# EAGLE board Atmega32_Breakout (EAGLE 6.5.0)

Size 25.07 x 40.63 mm. Coordinates in mm from the lower left corner, seen from the top.
Outline: 0,0 25.07,0 25.07,40.63 0,40.63 0,0
Copper layers (1*16): Top 0.035mm / dielectric 1.5mm / Bottom 0.035mm
Design rules "default": minimum track width 10mil, minimum drill 24mil, track to track 8mil, track to pad 8mil, pad to pad 8mil, via to via 8mil, smd to smd 8mil, copper to edge 40mil, drill to drill 8mil, minimum pad ring 10mil, minimum via ring 8mil, stop-mask expansion 4mil, vias tented up to drill 0mil, thermal gap 10mil

## Footprints (pad centres in the part's own frame; a part is rotated, then mirrored left to right if it is on the bottom)
1X08_PIN1_NO_SILK = drill 1.016 pad 1.88 square: 1 0,0 | drill 1.016 pad 1.88: 2 2.54,0; 3 5.08,0; 4 7.62,0; 5 10.16,0; 6 12.7,0; 7 15.24,0; 8 17.78,0
TQFP32-08 = smd 1.27 x 0.559: 1 -4.293,2.8; 2 -4.293,2; 3 -4.293,1.2; 4 -4.293,0.4; 5 -4.293,-0.4; 6 -4.293,-1.2; 7 -4.293,-2; 8 -4.293,-2.8; 17 4.293,-2.8; 18 4.293,-2; 19 4.293,-1.2; 20 4.293,-0.4; 21 4.293,0.4; 22 4.293,1.2; 23 4.293,2; 24 4.293,2.8 | smd 0.559 x 1.27: 9 -2.8,-4.293; 10 -2,-4.293; 11 -1.2,-4.293; 12 -0.4,-4.293; 13 0.4,-4.293; 14 1.2,-4.293; 15 2,-4.293; 16 2.8,-4.293; 25 2.8,4.293; 26 2,4.293; 27 1.2,4.293; 28 0.4,4.293; 29 -0.4,4.293; 30 -1.2,4.293; 31 -2,4.293; 32 -2.8,4.293

## Placement (x,y rotation side)
JP1  [1X08_PIN1_NO_SILK]  1.27,19.05 270 top
JP2  [1X08_PIN1_NO_SILK]  1.27,39.37 270 top
JP3  [1X08_PIN1_NO_SILK]  24.13,1.27 90 top
JP4  [1X08_PIN1_NO_SILK]  24.13,21.59 90 top
U1  ATMEGA328P  [TQFP32-08]  12.85,19.95 315 top

## Library data of the parts
JP1-JP4 = SparkFun-Connectors
U1 = SparkFun-DigitalIC; PROD_ID: IC-09069

## Nets
ADC6: JP3.8 U1.19
ADC7: JP2.1 U1.22
AGND: JP4.1 U1.21
AREF: JP4.4 U1.20
AVCC: JP4.7 U1.18
GND: JP1.8 U1.3 U1.5
PB0: JP1.2 U1.12
PB1: JP1.3 U1.13
PB2: JP1.4 U1.14
PB3: JP1.5 U1.15
PB4: JP1.6 U1.16
PB5: JP1.7 U1.17
PB6: JP4.3 U1.7
PB7: JP4.2 U1.8
PC0: JP3.2 U1.23
PC1: JP3.3 U1.24
PC2: JP3.4 U1.25
PC3: JP3.5 U1.26
PC4: JP3.6 U1.27
PC5: JP3.7 U1.28
PD0: JP2.2 U1.30
PD1: JP2.3
PD2: JP2.4 U1.32
PD3: JP2.5 U1.1
PD4: JP2.6 U1.2
PD5: JP2.7 U1.9
PD6: JP2.8 U1.10
PD7: JP1.1 U1.11
RES: JP4.8 U1.29
VCC: JP4.5 JP4.6 U1.4 U1.6

## Tracks (layer width: path | path; a pad name or v marks a point on that pad's centre or on a via)
ADC6  (1 unrouted)
ADC7  (1 unrouted)
AGND  (1 unrouted)
AREF  (1 unrouted)
AVCC  (1 unrouted)
GND  (2 unrouted)
PB0  (1 unrouted)
PB1  (1 unrouted)
PB2  (1 unrouted)
PB3  (1 unrouted)
PB4  (1 unrouted)
PB5  (1 unrouted)
PB6  (1 unrouted)
PB7  (1 unrouted)
PC0  (1 unrouted)
PC1  (1 unrouted)
PC2  (1 unrouted)
PC3  (1 unrouted)
PC4  (1 unrouted)
PC5  (1 unrouted)
PD0  (1 unrouted)
PD2  (1 unrouted)
PD3  (1 unrouted)
PD4  (1 unrouted)
PD5  (1 unrouted)
PD6  (1 unrouted)
PD7  (1 unrouted)
RES  (1 unrouted)
VCC  (3 unrouted)